# Altium PCB Microneedle_Patch_Panel.PcbDoc
Units mm, origin at the board's own origin, x right, y up, seen from the top; angles counter-clockwise.
Board outline 131.95 x 214.4 mm, 2 copper layers (Top, Bottom), stack 0.137 mm thick; 4 components, 1 nets, 4 pads, 0 vias.
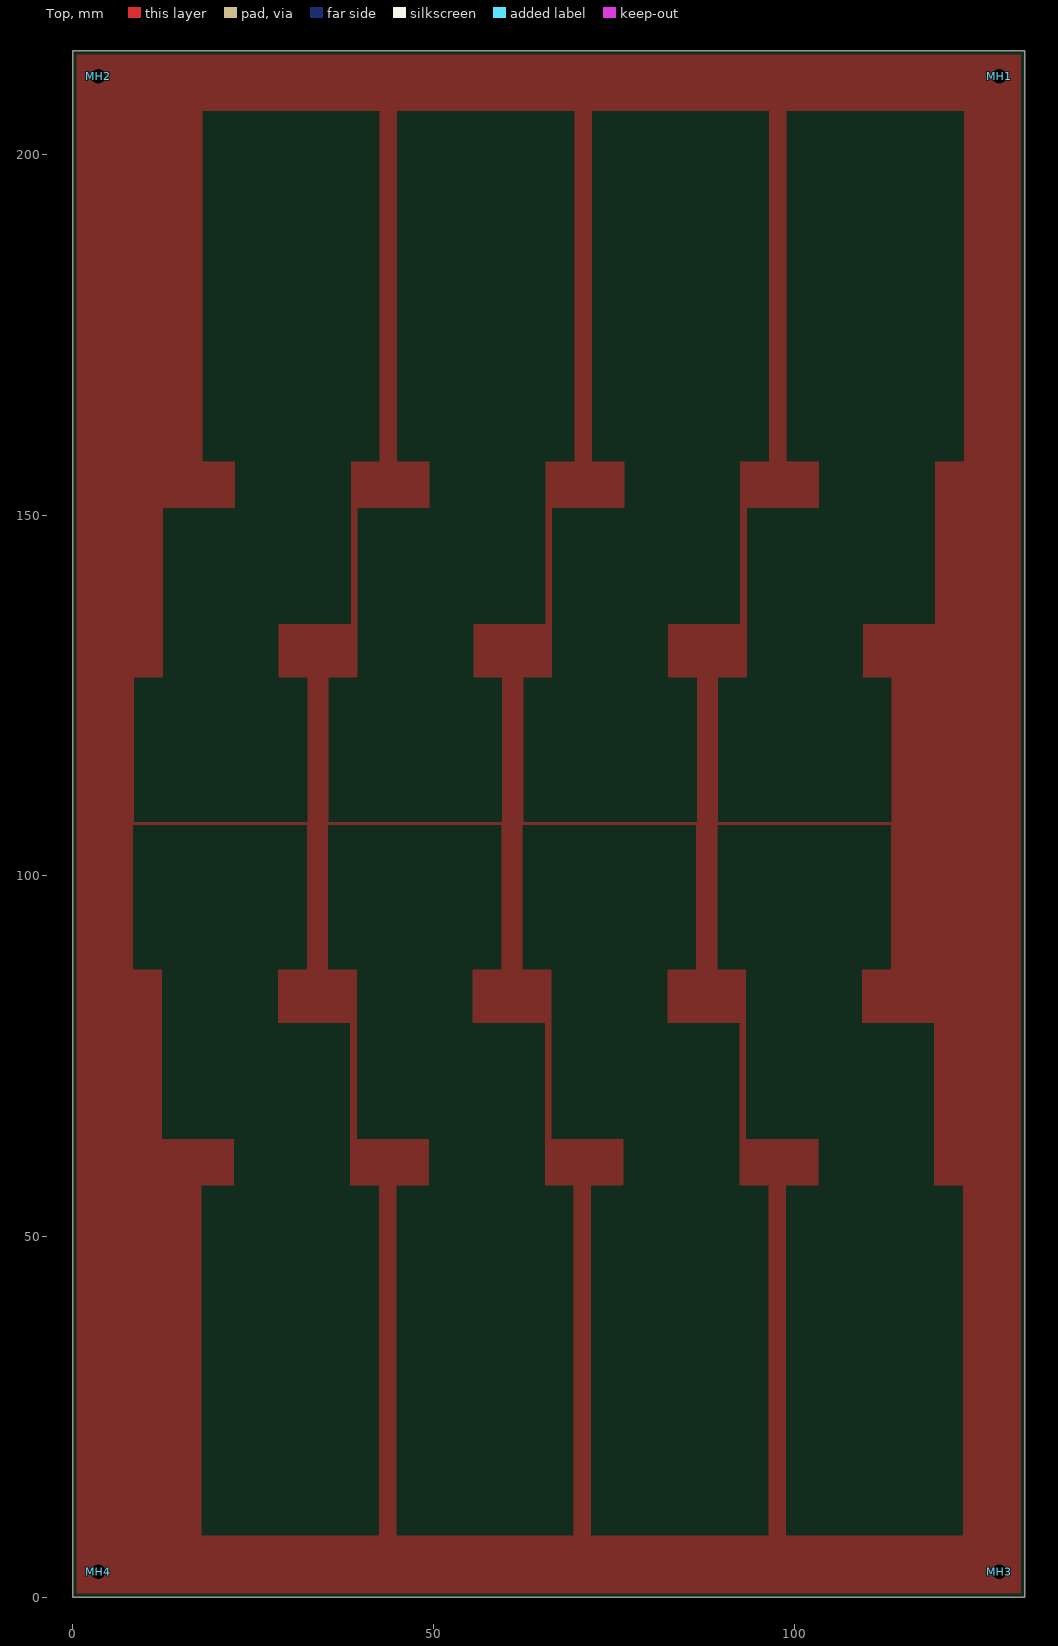
[diagram p0: Top view]
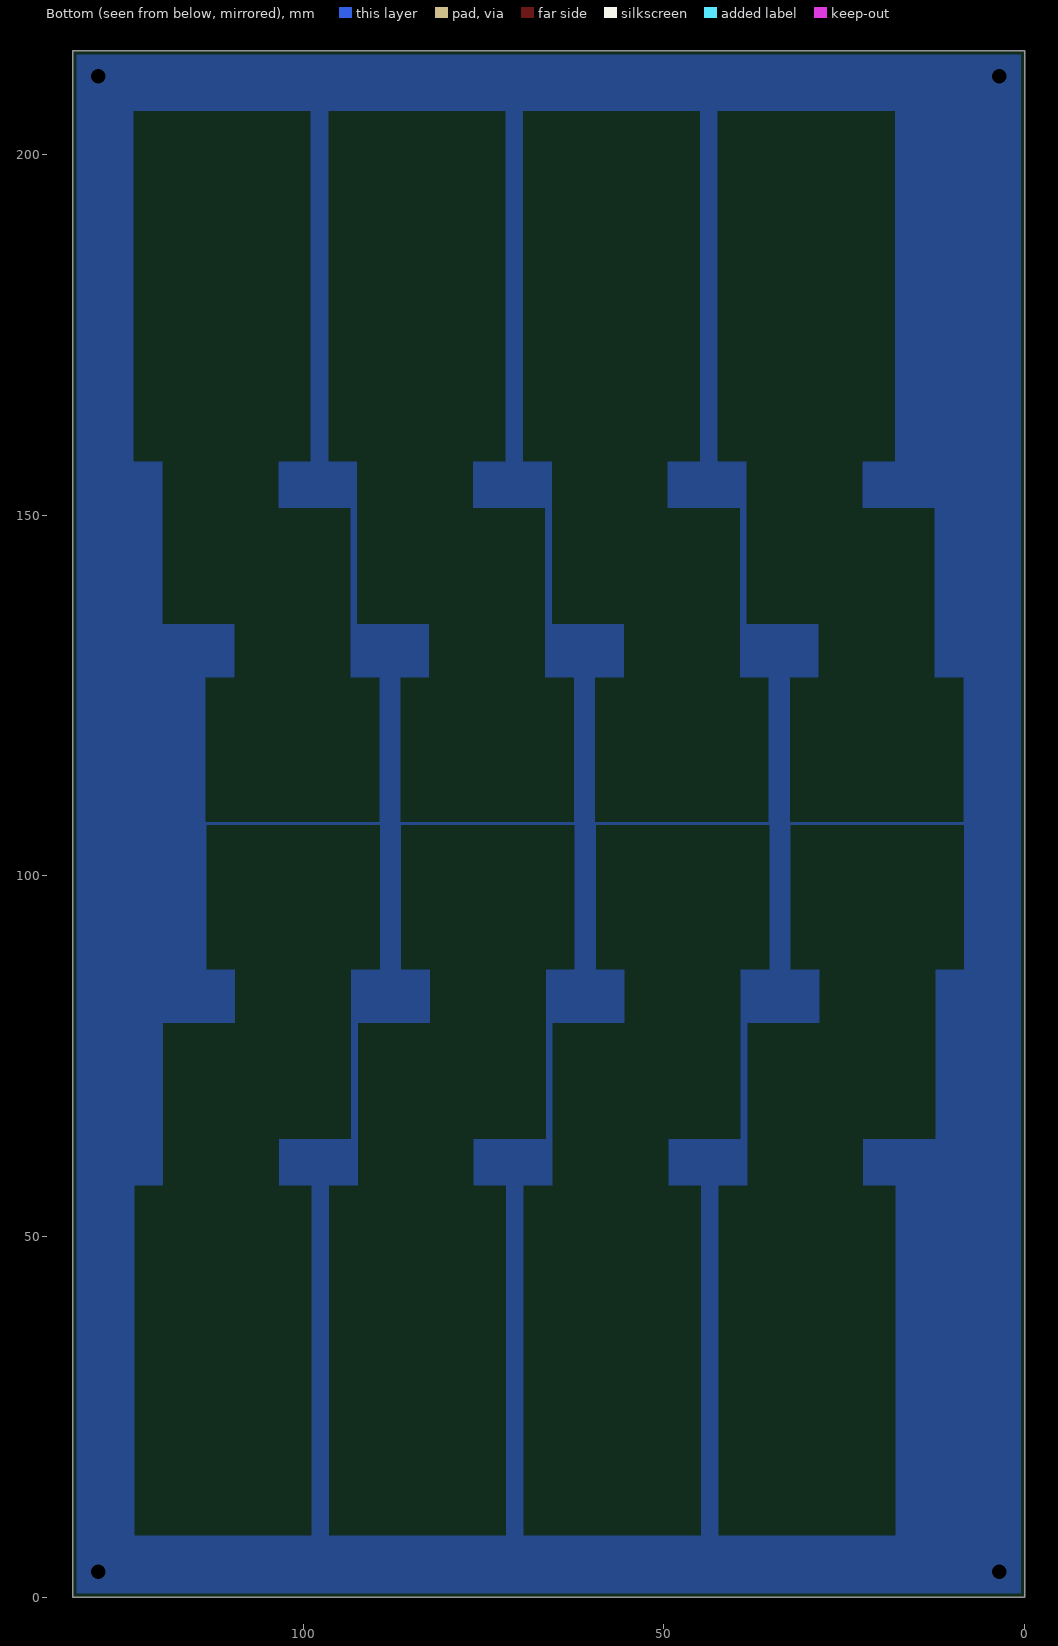
[diagram p1: Bottom view, seen from below]

## Layer stack, top to bottom
Board Layer Stack Top Coverlay: solder mask 0.025, Polymide, Dk 3.4
Adhesive 3: prepreg 0.025, Adhesive, Dk 3.3
Top: signal copper 0.018
Dielectric 1: core 0.013, Composite dielectric, Dk 3.3
Dielectric 3: core 0.025, Polymide, Dk 3.4
Dielectric 2: core 0.013, Composite dielectric, Dk 3.3
Bottom: signal copper 0.018
Adhesive 2: prepreg 0.025, Adhesive, Dk 3.3
Board Layer Stack Bottom Coverlay: solder mask 0.025, Polymide, Dk 3.4

## Board outline
0,0 0,214.4 131.95,214.4 131.95,0

## Design rules (kind name [scope] priority, off if disabled: settings)
BoardOutlineClearance [All] p1: gap=0.5 ignorepadtopadclearanceinfootprint=FALSE
Clearance [All] p1: gap=0.5 ignorepadtopadclearanceinfootprint=FALSE
ComponentClearance [All] p1: gap=0.102 collisioncheckmode=3 verticalgap=0.102 showdistances=FALSE
HoleSize [All] p1: absolutevalues=TRUE maxlimit=25.4 minlimit=0.102 maxpercent=80.000 minpercent=20.000
HoleToHoleClearance [All] p1: gap=0.254 allowstackedmicrovias=FALSE
MinimumSolderMaskSliver [All] p1: minsoldermaskwidth=0.102
PlaneClearance [All] p1: clearance=0.152
PlaneConnect [All] p1: pad.planeconnectstyle=Relief pad.reliefexpansion=0.508 pad.reliefentries=4 pad.reliefconductorwidth=0.254 pad.reliefairgap=0.254 via.planeconnectstyle=Direct via.reliefexpansion=0.508 via.reliefentries=4 via.reliefconductorwidth=0.254 via.reliefairgap=0.254
PolygonConnect [All] p1: connectstyle=Direct reliefconductorwidth=0.254 reliefentries=4 polygonreliefangle="90 Angle" airgapwidth=0.254
RoutingVias [All] p1: holewidth=0.254 width=0.508 viastyle="Through Hole" minholewidth=0.254 minwidth=0.508 maxholewidth=0.254 maxwidth=0.508
SilkToSilkClearance [All] p1: silktosilkclearance=0.102
SilkToSolderMaskClearance [IsPad] p1: minsilkscreentomaskgap=0.051 clearancetoexposedcopper=FALSE
SolderMaskExpansion [All] p1: expansion=0.051 istentingtop=FALSE
SupplyNets "Schematic Supply Nets" [InNet('GND')] p1: voltage=0.000
Width [All] p1: maxlimit=25.4 minlimit=0.102 preferedwidth=0.152
22 further rules are at their usual default settings.

## Components (designator, comment, footprint, x,y, rotation, side; value= is the part's Value field where it differs from the comment)
MH1 "2 mm" MH_2MM#1 128.35,209.3 r0 top
MH2 "2 mm" MH_2MM#2 8.85,207.1 r90 top
MH3 "2 mm" MH_2MM#3 127.1,3.55 r90 top
MH4 "2 mm" MH_2MM#4 4.25,4.25 r90 top

## Footprints (in the part's own frame and the unit in brackets; to place one, negate y for a bottom-side part, rotate by r counter-clockwise, add the part's x,y. Pads: shape width x height; smd on the part's side, far side on the other; paste and mask are expansions set on the pad)
MH_2MM#1 [mm] "Mounting Hole - 2 mm"
  round 0.1 hole 2 unplated paste-2539.97 mask+0: 1(0.1,1.6)
MH_2MM#2 [mm] "Mounting Hole - 2 mm"
  round 0.1 hole 2 unplated paste-2539.97 mask+0: 1(3.8,5.35)
MH_2MM#3 [mm] "Mounting Hole - 2 mm"
  round 0.1 hole 2 unplated paste-2539.97 mask+0: 1(-0.05,-1.35)
MH_2MM#4 [mm] "Mounting Hole - 2 mm"
  round 0.1 hole 2 unplated paste-2539.97 mask+0: 1(-0.75,0.75)

## Part data
MH1 MH2 MH3 MH4: library part MH_2MM, "Mounting Hole - 2 mm"

## Nets (pads, with @x,y where several pads share a name; then routed paths per layer and width w, separated by ;. In a path a pad name is that pad's centre, name@x,y a point inside that pad or via, vN(x,y) a via of type N, cw(c..) or ccw(c..) an arc to the next point about the centre after c; other vN are vias at no path point)
GND: MH1.1 MH2.1 MH3.1 MH4.1

## Polygon pours and split planes (outlines as drawn)
GND on Top "TOP_PANEL" (solid, remove dead copper, pour order 0): 0,214.4 0,0 131.95,0 131.95,214.4
GND on Bottom "BOT_PANEL" (solid, remove dead copper, pour order 1): 0,214.4 0,0 131.95,0 131.95,214.4

## Other copper
Top:
  pour cut-out: 98.9,8.55 123.4,8.55 123.4,57.05 119.4,57.05 119.4,79.55 109.4,79.55 109.4,87.05 113.4,87.05 113.4,107.05 89.4,107.05 89.4,87.05 93.4,87.05 93.4,63.55 103.4,63.55 103.4,57.05 98.9,57.05
  pour cut-out: 71.9,8.55 96.4,8.55 96.4,57.05 92.4,57.05 92.4,79.55 82.4,79.55 82.4,87.05 86.4,87.05 86.4,107.05 62.4,107.05 62.4,87.05 66.4,87.05 66.4,63.55 76.4,63.55 76.4,57.05 71.9,57.05
  pour cut-out: 44.9,8.55 69.4,8.55 69.4,57.05 65.4,57.05 65.4,79.55 55.4,79.55 55.4,87.05 59.4,87.05 59.4,107.05 35.4,107.05 35.4,87.05 39.4,87.05 39.4,63.55 49.4,63.55 49.4,57.05 44.9,57.05
  pour cut-out: 17.9,8.55 42.4,8.55 42.4,57.05 38.4,57.05 38.4,79.55 28.4,79.55 28.4,87.05 32.4,87.05 32.4,107.05 8.4,107.05 8.4,87.05 12.4,87.05 12.4,63.55 22.4,63.55 22.4,57.05 17.9,57.05
  pour cut-out: 99,206 123.5,206 123.5,157.5 119.5,157.5 119.5,135 109.5,135 109.5,127.5 113.5,127.5 113.5,107.5 89.5,107.5 89.5,127.5 93.5,127.5 93.5,151 103.5,151 103.5,157.5 99,157.5
  pour cut-out: 72,206 96.5,206 96.5,157.5 92.5,157.5 92.5,135 82.5,135 82.5,127.5 86.5,127.5 86.5,107.5 62.5,107.5 62.5,127.5 66.5,127.5 66.5,151 76.5,151 76.5,157.5 72,157.5
  pour cut-out: 45,206 69.5,206 69.5,157.5 65.5,157.5 65.5,135 55.5,135 55.5,127.5 59.5,127.5 59.5,107.5 35.5,107.5 35.5,127.5 39.5,127.5 39.5,151 49.5,151 49.5,157.5 45,157.5
  pour cut-out: 18,206 42.5,206 42.5,157.5 38.5,157.5 38.5,135 28.5,135 28.5,127.5 32.5,127.5 32.5,107.5 8.5,107.5 8.5,127.5 12.5,127.5 12.5,151 22.5,151 22.5,157.5 18,157.5
Bottom:
  pour cut-out: 18,206 42.5,206 42.5,157.5 38.5,157.5 38.5,135 28.5,135 28.5,127.5 32.5,127.5 32.5,107.5 8.5,107.5 8.5,127.5 12.5,127.5 12.5,151 22.5,151 22.5,157.5 18,157.5
  pour cut-out: 45,206 69.5,206 69.5,157.5 65.5,157.5 65.5,135 55.5,135 55.5,127.5 59.5,127.5 59.5,107.5 35.5,107.5 35.5,127.5 39.5,127.5 39.5,151 49.5,151 49.5,157.5 45,157.5
  pour cut-out: 72,206 96.5,206 96.5,157.5 92.5,157.5 92.5,135 82.5,135 82.5,127.5 86.5,127.5 86.5,107.5 62.5,107.5 62.5,127.5 66.5,127.5 66.5,151 76.5,151 76.5,157.5 72,157.5
  pour cut-out: 99,206 123.5,206 123.5,157.5 119.5,157.5 119.5,135 109.5,135 109.5,127.5 113.5,127.5 113.5,107.5 89.5,107.5 89.5,127.5 93.5,127.5 93.5,151 103.5,151 103.5,157.5 99,157.5
  pour cut-out: 17.9,8.55 42.4,8.55 42.4,57.05 38.4,57.05 38.4,79.55 28.4,79.55 28.4,87.05 32.4,87.05 32.4,107.05 8.4,107.05 8.4,87.05 12.4,87.05 12.4,63.55 22.4,63.55 22.4,57.05 17.9,57.05
  pour cut-out: 44.9,8.55 69.4,8.55 69.4,57.05 65.4,57.05 65.4,79.55 55.4,79.55 55.4,87.05 59.4,87.05 59.4,107.05 35.4,107.05 35.4,87.05 39.4,87.05 39.4,63.55 49.4,63.55 49.4,57.05 44.9,57.05
  pour cut-out: 71.9,8.55 96.4,8.55 96.4,57.05 92.4,57.05 92.4,79.55 82.4,79.55 82.4,87.05 86.4,87.05 86.4,107.05 62.4,107.05 62.4,87.05 66.4,87.05 66.4,63.55 76.4,63.55 76.4,57.05 71.9,57.05
  pour cut-out: 98.9,8.55 123.4,8.55 123.4,57.05 119.4,57.05 119.4,79.55 109.4,79.55 109.4,87.05 113.4,87.05 113.4,107.05 89.4,107.05 89.4,87.05 93.4,87.05 93.4,63.55 103.4,63.55 103.4,57.05 98.9,57.05

## Silkscreen, mask and mechanical layers (free items; w line width, h text height)
Panel Outline:
  the board outline again, w0.2
Route Tool Path:
  drawing of 338 lines, arcs and shapes, not listed
Manufacturing Notes:
  lines w0.2: -108.5,106.4 -106.5,106.4 -106.5,104.4 ; -65.15,15.35 -65.15,13.35 -63.15,13.35
  lines w0.254: 135.65,111.31 202.96,111.31 202.96,115.12 135.65,115.12 135.65,118.93 202.96,118.93 202.96,122.74 135.65,122.74 135.65,126.55 202.96,126.55 202.96,130.36 135.65,130.36 135.65,134.17 202.96,134.17 202.96,137.98 135.65,137.98 135.65,141.79 202.96,141.79 202.96,143.06 ; 149.606,153.23 135.636,153.23 202.946,153.23 195.326,153.23 ; 149.623,153.178 149.623,156.988 ; 162.323,153.228 162.323,157.038 ; 172.523,153.328 172.523,157.138 ; 186.473,153.328 186.473,157.138 ; 195.323,153.228 195.323,157.038 ; 195.326,160.89 195.326,157.08 ; 195.34,107.5 195.34,149.41 ; 195.34,153.22 195.34,149.41 ; 202.933,153.272 202.933,157.082 ; 202.946,153.27 135.636,153.27 135.636,157.08 ; 202.96,145.6 135.65,145.6 135.65,149.41 ; 135.636,157.08 202.946,157.08 ; 135.636,157.08 149.606,157.08 149.606,160.89 162.306,160.89 162.306,157.08 ; 135.636,157.08 135.636,160.89 202.946,160.89 202.946,157.08 ; 135.65,149.41 149.62,149.41 ; 135.65,149.41 202.96,149.41 ; 135.65,149.41 135.65,107.5 202.96,107.5 202.96,149.41 ; 135.65,149.41 135.65,153.22 202.96,153.22 202.96,149.41 ; 149.62,149.41 149.62,153.22 162.32,153.22 162.32,149.41 ; 149.62,149.41 149.62,107.5 162.32,107.5 162.32,149.41 ; 162.306,157.08 172.466,157.08 ; 162.306,157.08 172.466,157.08 ; 162.32,149.41 172.48,149.41 ; 162.32,149.41 172.48,149.41 ; 172.466,157.08 172.466,160.89 186.436,160.89 186.436,157.08 ; 172.48,149.41 172.48,107.5 186.45,107.5 186.45,149.41 ; 172.48,149.41 172.48,153.22 186.45,153.22 186.45,149.41 ; 186.436,157.08 195.326,157.08 ; 186.436,157.08 195.326,157.08 ; 186.45,149.41 195.34,149.41 ; 186.45,149.41 195.34,149.41 ; 195.326,153.23 186.436,153.23 195.326,153.23 ; 195.326,157.08 202.946,157.08 ; 195.34,149.41 202.96,149.41 ; 162.306,153.23 172.466,153.23 162.306,153.23
  text "SUPPLY AS AN INTACT 8-PIECE FPC PANEL" at 134.756,211.203 h1.02
  text "RETAIN ALL SOLID TABS FOR MANUAL SEPARATION" at 134.756,209.203 h1.02
  text "NO MOUSE-BITE PERFORATIONS OR V-SCORING" at 134.756,207.203 h1.02
  text "GM7 SHOWS MATERIAL TO REMOVE. PLOTTED WIDTH DEFINES THE 2.00 MM FINISHED SLOTS, NOT CUTTING CENTRELINES" at 134.96,202.542 h1.02
  text "RETAIN 2.00 MM MINIMUM TABS AT GM7 INTERRUPTIONS. INDIVIDUAL FPC OUTLINES ARE REFERENCE ONLY; DO NOT CUT THROUGH TABS" at 134.96,200.372 h1.02
  text "FOLLOW THE PANEL OUTLINE. RETAIN THE INTERNAL SUPPORTS AND OUTER RAILS" at 134.96,198.203 h1.02
  text "FOUR 2.00 MM (DIAMETER) NON-PLATED THROUGH-HOLES PER DRILL FILE" at 134.96,196.203 h1.02
  text "KEEP STIFFENERS WITHIN SPECIFIED BOUNDARIES AND OUT OF TABS" at 135.163,194.203 h1.02
  text "STIFFFENER:" at 135.397,183.387 h1.02
  text "MATERIAL: POLYMIDE (PI)" at 136.667,180.847 h1.02
  text "SIDE: TOP AND BOTTOM SIDE OF FPC" at 136.667,178.307 h1.02
  text "TOP STIFFENER AREA: DEFINED BY \"TOP STIFFENER\" (GM18) MECHANICAL LAYER" at 136.667,175.767 h1.02
  text "BOTTOM STIFFENER AREA: DEFINED BY \"BOTTOM STIFFENER\" (GM19) MECHANICAL LAYER" at 136.653,173.303 h1.02
  text "STIFFENER SHALL COVER THE ENTIRE DEFINED AREA" at 136.767,170.927 h1.02
  text "ALIGN STIFFENER EDGES WITH THE DEFINED STIFFENER OUTLINE" at 136.767,168.387 h1.02
  text "FINAL FPC THICKNESS IN ZIF CONTACT REGION: 0.3 MM" at 136.767,165.847 h1.02
  text "Type" at 139.7,158.636 h1.52
  text "Material" at 153.162,158.636 h1.52
  text "Weight" at 165.354,158.636 h1.52
  text "Dk" at 190.246,158.636 h1.52
  text "Thickness" at 176.022,158.604 h1.52
  text "Df" at 198.628,158.588 h1.52
  text "0.088 mm" at 176.149,154.654 h1.52
  text "3.4" at 190.119,154.654 h1.52
  text "0.015" at 197.739,154.637 h1.52
  text "Top Stiffener" at 137.204,154.621 h1.52
  text "Polymide" at 153.289,154.62 h1.52
  text "0.025 mm" at 176.403,150.779 h1.52
  text "Adhesive" at 137.458,150.492 h1.52
  text "Polymide" at 153.516,147.216 h1.52
  text "0.025 mm" at 176.376,146.947 h1.52
  text "0.015" at 197.966,146.947 h1.52
  text "Top Coverlay" at 137.431,146.93 h1.52
  text "3.4" at 190.346,146.93 h1.52
  text "0.025 mm" at 176.376,143.137 h1.52
  text "Adhesive" at 137.431,142.849 h1.52
  text "0.018 mm" at 176.376,139.327 h1.52
  text "Top Layer" at 137.431,139.31 h1.52
  text "0.5 oz" at 164.946,139.041 h1.52
  text "0.013 mm" at 176.376,135.517 h1.52
  text "Adhesive" at 137.431,135.229 h1.52
  text "0.025 mm" at 176.376,131.707 h1.52
  text "3.4" at 190.346,131.707 h1.52
  text "Polymide" at 153.516,131.673 h1.52
  text "0.015" at 197.966,131.69 h1.52
  text "Core" at 137.431,131.421 h1.52
  text "0.013 mm" at 176.376,127.897 h1.52
  text "Adhesive" at 137.431,127.609 h1.52
  text "0.5 oz" at 165.25,124.2 h1.52
  text "0.018 mm" at 176.376,124.087 h1.52
  text "Bottom Layer" at 137.431,124.07 h1.52
  text "0.025 mm" at 176.376,120.277 h1.52
  text "Adhesive" at 137.431,119.989 h1.52
  text "Polymide" at 153.516,116.719 h1.52
  text "0.025 mm" at 176.376,116.467 h1.52
  text "3.4" at 190.346,116.467 h1.52
  text "Bottom Coverlay" at 137.431,116.45 h1.52
  text "0.015" at 197.966,116.45 h1.52
  text "0.025 mm" at 176.376,112.943 h1.52
  text "Adhesive" at 137.431,112.656 h1.52
  text "0.088 mm" at 176.376,109.133 h1.52
  text "3.4" at 190.346,109.133 h1.52
  text "0.015" at 197.966,109.116 h1.52
  text "Polymide" at 153.516,109.099 h1.52
  text "Bottom Stiffener" at 137.431,108.847 h1.52
  text "Finished thickness (with 1 layer of stiffener): 0.30 mm nominal" at 135.71,104.811 h1.52
  text "Finished thickness (without stiffener): 0.187 mm nominal" at 135.81,103.111 h1.52
  text "Substrate Finish: ENEPIG" at 135.81,101.25 h1.52
  text "Thickness of Immersion Gold: 4U\"" at 135.75,99.429 h1.52

## Panel: embedded boards
"..\..\Microneedle_Patch\Microneedle_Patch_V2.PcbDoc" at 39.85,203.3, 1 rows x 1 columns, spacing 63.5 x 38.1, rotation 180
"..\..\Microneedle_Patch\Microneedle_Patch_V2.PcbDoc" at 120.85,203.3, 1 rows x 1 columns, spacing 63.5 x 38.1, rotation 180
"..\..\Microneedle_Patch\Microneedle_Patch_V2.PcbDoc" at 93.85,203.3, 1 rows x 1 columns, spacing 63.5 x 38.1, rotation 180
"..\..\Microneedle_Patch\Microneedle_Patch_V2.PcbDoc" at 66.85,203.3, 1 rows x 1 columns, spacing 63.5 x 38.1, rotation 180
"..\..\Microneedle_Patch_Mirrored\Microneedle_Patch_Mirrored_V2.PcbDoc" at 38.1,11.1, 1 rows x 1 columns, spacing 63.5 x 38.1, rotation 0
"..\..\Microneedle_Patch_Mirrored\Microneedle_Patch_Mirrored_V2.PcbDoc" at 65.1,11.1, 1 rows x 1 columns, spacing 63.5 x 38.1, rotation 0
"..\..\Microneedle_Patch_Mirrored\Microneedle_Patch_Mirrored_V2.PcbDoc" at 92.1,11.1, 1 rows x 1 columns, spacing 63.5 x 38.1, rotation 0
"..\..\Microneedle_Patch_Mirrored\Microneedle_Patch_Mirrored_V2.PcbDoc" at 11.1,11.1, 1 rows x 1 columns, spacing 63.5 x 38.1, rotation 0